# Altium PCB 拉低1.8V.PcbDoc
Units mil, origin at the board's own origin, x right, y up, seen from the top; angles counter-clockwise.
Board outline 1865 x 1145 mil, 2 copper layers (Top Layer, Bottom Layer); 15 components, 10 nets, 48 pads, 0 vias.
Unrouted connection lines stored in the file: 2.
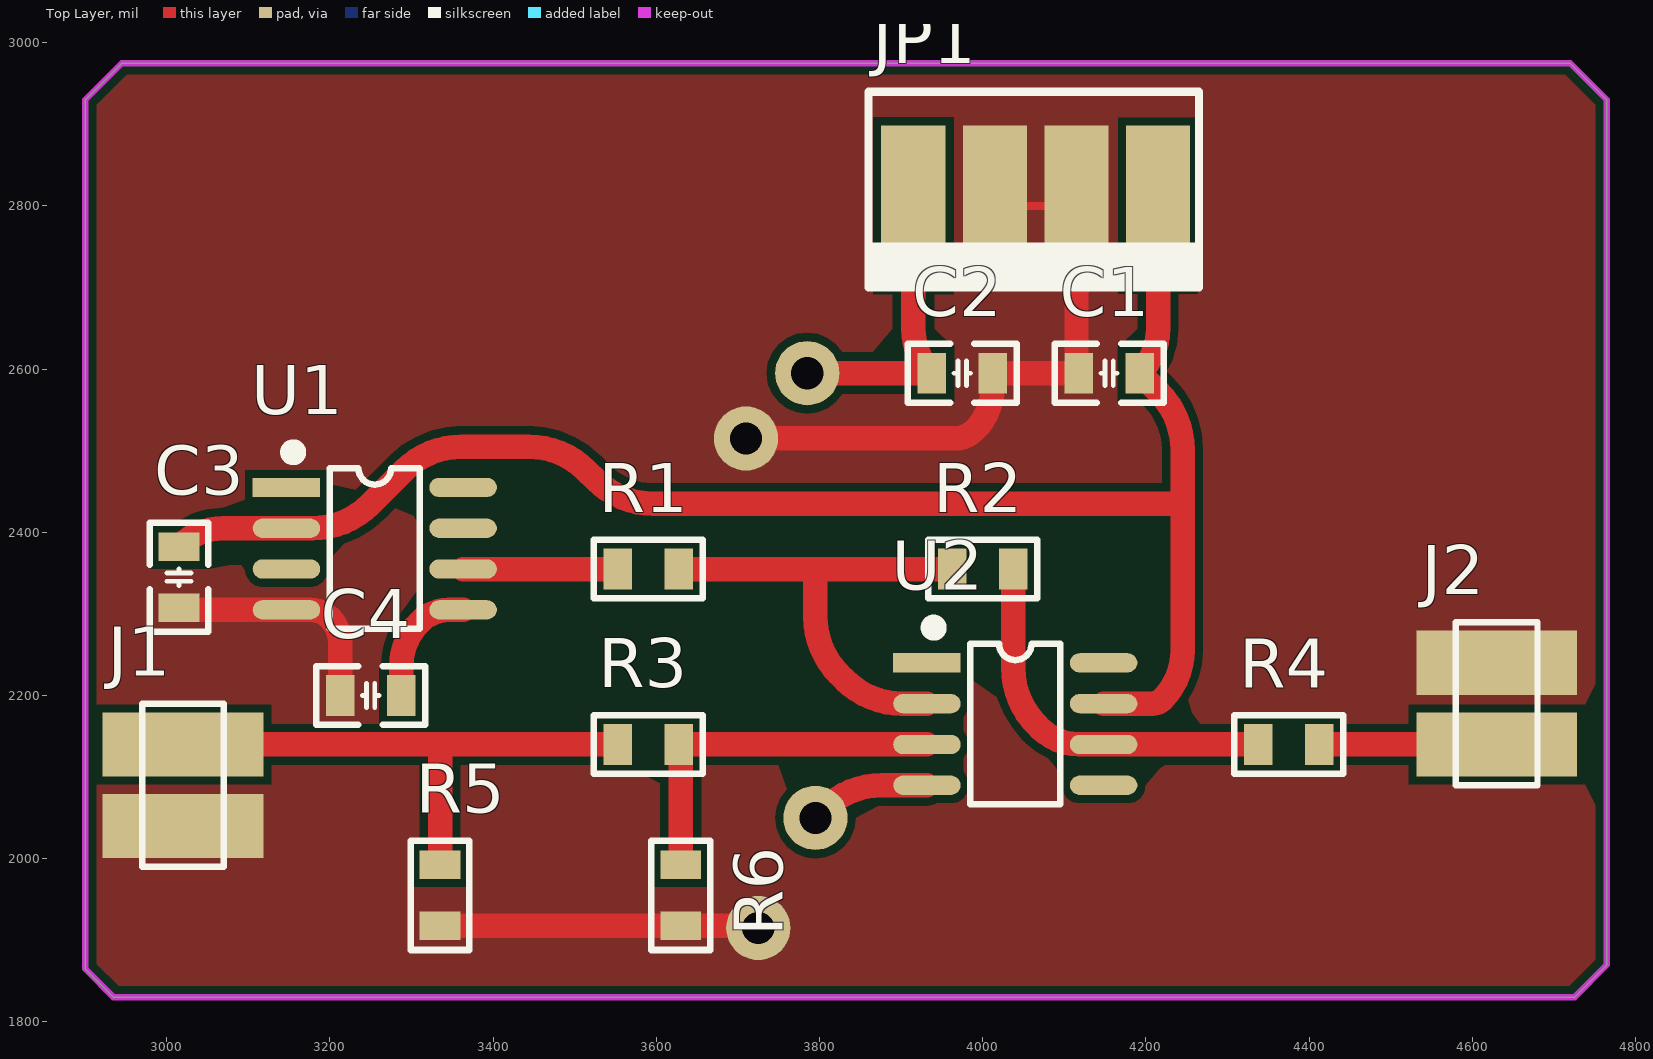
[diagram p0: Top Layer view]
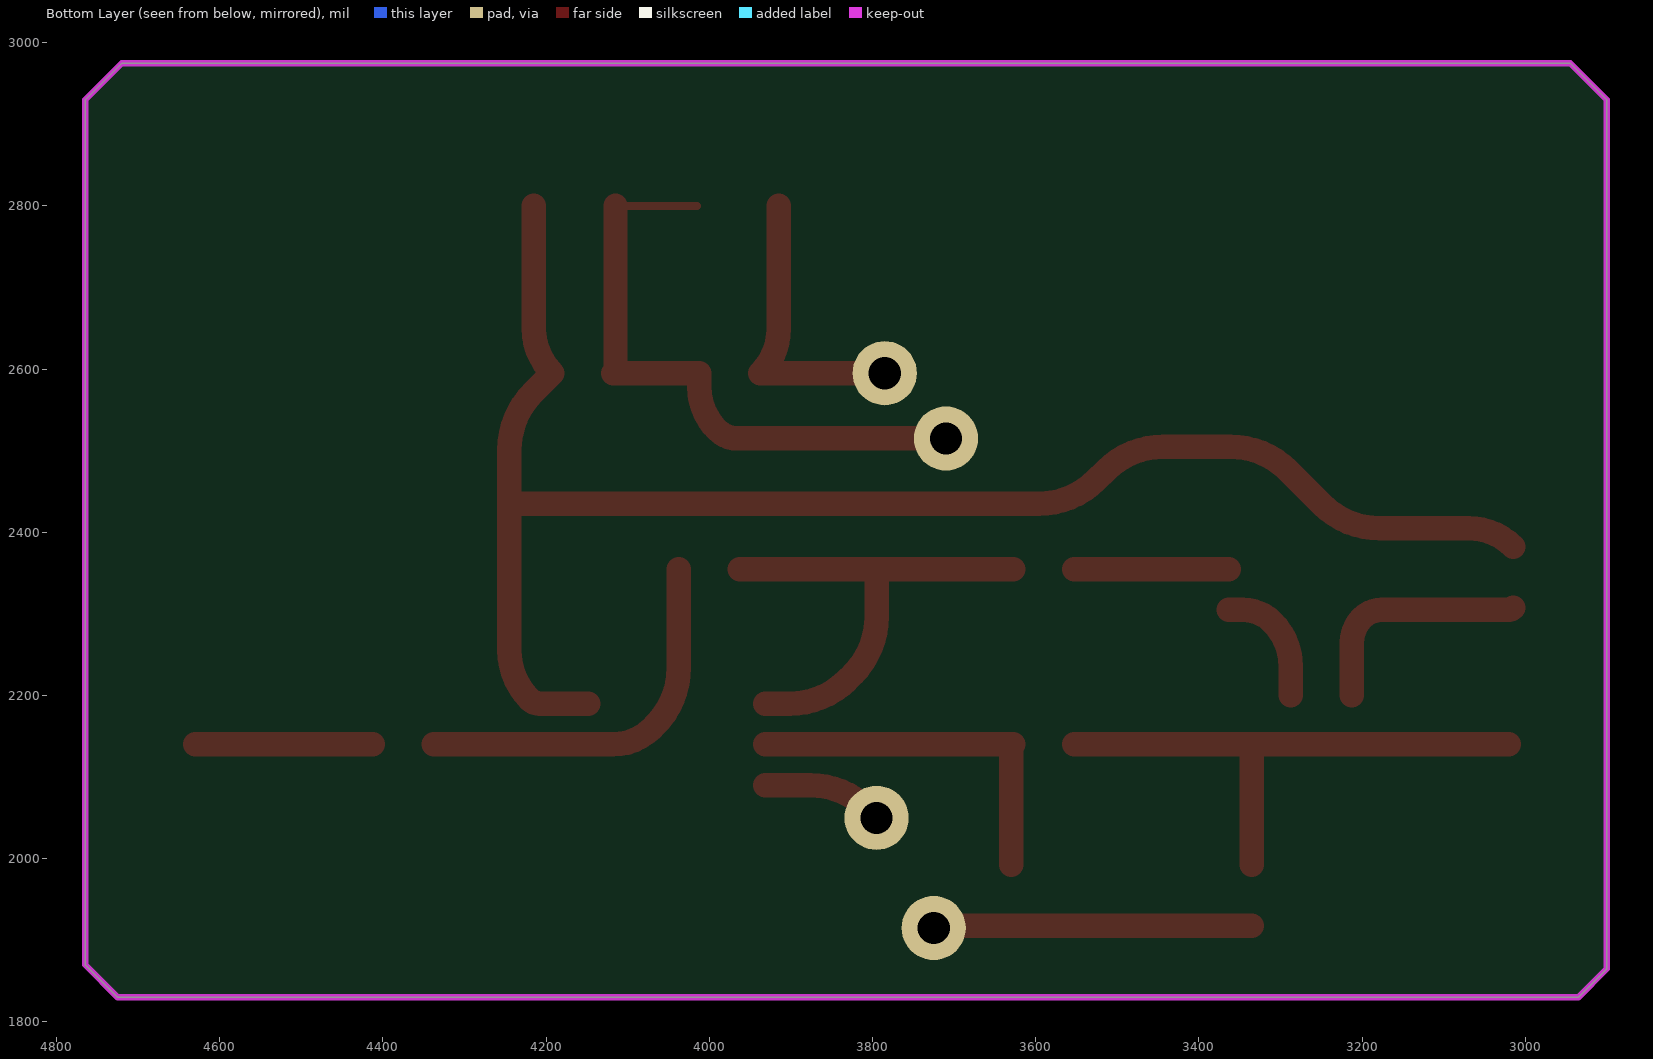
[diagram p1: Bottom Layer view, seen from below]

## Layer stack, top to bottom
Top Solder: solder mask 0.4, Solder Resist, Dk 3.5
Top Layer: signal copper 1.4
Dielectric 1: dielectric 12.6, FR-4, Dk 4.8
Bottom Layer: signal copper 1.4
Bottom Solder: solder mask 0.4, Solder Resist, Dk 3.5

## Board outline
2900,1865 2935,1830 4725,1830 4765,1870 4765,2930 4720,2975 2945,2975 2900,2930

## Design rules (kind name [scope] priority, off if disabled: settings)
Clearance [All] p1: gap=10
PlaneConnect [All] p1: planeconnectstyle=Direct reliefexpansion=20 reliefentries=4 reliefconductorwidth=10 reliefairgap=10
PolygonConnect [All] p1: connectstyle=Direct reliefconductorwidth=10 reliefentries=4 polygonreliefangle="90 Angle" airgapwidth=10
RoutingVias [All] p1: holewidth=28 width=50 viastyle="Through Hole" minholewidth=28 minwidth=50 maxholewidth=28 maxwidth=50
SolderMaskExpansion [All] p1: expansion=4
Width [All] p1: maxlimit=30 minlimit=10 preferedwidth=10 minimp=50.000000 maximp=50.000000 favimp=50.000000
29 further rules are at their usual default settings.

## Components (designator, comment, footprint, x,y, rotation, side; value= is the part's Value field where it differs from the comment)
C1 "104" "C 0805_L" 4155,2595 r0 top
C2 "104" "C 0805_L" 3975,2595 r180 top
C3 "104" "C 0805_L" 3015,2345 r90 top
C4 "104" "C 0805_L" 3250,2200 r180 top
J1 "SMA" HDR2.54-LI-2P 3020,2090 r270 top
J2 "SMA" HDR2.54-LI-2P 4630,2190 r90 top
JP1 "HDR-1X4" KF2510-LI-4P 4065,2800 r180 top
R1 "2.7K" "R 0805_L" 3590,2355 r0 top
R2 "1k" "R 0805_L" 4000,2355 r0 top
R3 "1k" "R 0805_L" 3590,2140 r0 top
R4 "51R" "R 0805_L" 4375,2140 r0 top
R5 "51R" "R 0805_L" 3335,1955 r90 top
R6 "2.7k" "R 0805_L" 3630,1955 r90 top
U1 "REF" SOP8_M 3255,2380 r0 top
U2 "OPA" SOP8_M 4040,2165 r0 top

## Footprints (in the part's own frame and the unit in brackets; to place one, negate y for a bottom-side part, rotate by r counter-clockwise, add the part's x,y. Pads: shape width x height; smd on the part's side, far side on the other; paste and mask are expansions set on the pad)
"C 0805_L" [mil] "无极性贴片电容"
  rect 35x50 smd: 1(-37.4,0) 2(37.4,0)
  silkscreen extent -67,-36 67,36, body extent -39,-24 39,24, height 20
HDR2.54-LI-2P [mm] "排针，2脚"
  rect 2x5 smd: 1(-1.27,0) 2(1.27,0)
  silkscreen extent -2.54,-1.27 2.54,1.27, body extent -2.54,-1.27 2.54,1.27, height 8.5
KF2510-LI-4P [mm] "接插件/2A"
  rect 2x5 smd: 1(-3.81,0) 2(-1.27,0) 3(1.27,0) 4(3.81,0)
  silkscreen extent -5.08,-3.56 5.21,2.54, body extent -5.08,-3.5 5.08,2.4, height 11.05
"R 0805_L" [mil] "1/8W贴片电阻"
  rect 35x50 smd: 1(-37.4,0) 2(37.4,0)
  silkscreen extent -67,-36 67,36, body extent -39,-25 39,25, height 20
SOP8_M [mm] "5*6*1.8mm（长宽高）"
  rect 2.1x0.6 smd: 1(-2.75,1.905)
  oval 2.1x0.6 smd: 2(-2.75,0.635) 3(-2.75,-0.635) 4(-2.75,-1.905) 5(2.75,-1.905) 6(2.75,-0.635) 7(2.75,0.635) 8(2.75,1.905)
  silkscreen extent -2.69,-2.5 1.4,3.15, body extent -3,-2.5 3,2.5, height 1.9

## Part data
C1 C2 C3 C4: library part C, "无极性贴片电容"
JP1: library part "Header 4", "4P接插件"
R1 R2 R3 R4 R5 R6: library part R, "贴片电阻"
U1 U2: library part 单运放

## Free pads (board coordinates)
  round 78.74 hole 39.37: 0(3785,2595) 1(3795,2050) 2(3725,1915) 3(3710,2515)

## Nets (pads, with @x,y where several pads share a name; then routed paths per layer and width w, separated by ;. In a path a pad name is that pad's centre, name@x,y a point inside that pad or via, vN(x,y) a via of type N, cw(c..) or ccw(c..) an arc to the next point about the centre after c; other vN are vias at no path point)
GND: C1.1 C2.1 C3.1 C4.2 J1.2 J2.2 JP1.2 JP1.3 pad.2 pad.3 R5.1 R6.1 U1.4 | length 1447
  Top Layer w10: JP1.3 JP1.2
  Top Layer w30: C3.1 ccw(c3021.27,2313.86) 3021.27,2305 U1.4 3175.86,2305 cw(c3175.86,2270.86) 3200,2295 cw(c3169.58,2264.58) 3212.6,2264.58 C4.2 ; R5.1 R6.1 3718.73,1917.6 cw(c3718.73,1908.73) pad.2 ; pad.3 3965,2515 ccw(c3965,2551.21) 3990.61,2525.61 ccw(c3937.98,2578.23) 4012.4,2578.23 C2.1 C1.1 cw(c4123.86,2601.26) 4115,2601.26 JP1.2
NetC4_1: C4.1 U1.5 | length 153.3
  Top Layer w30: C4.1 3287.4,2235.45 cw(c3364.55,2235.45) 3310,2290 cw(c3346.21,2253.79) 3346.21,2305 U1.5
NetJ1_1: J1.1 R3.1 R5.2 | length 680.2
  Top Layer w30: J1.1 3335,2140 ; R5.2 3335,2140 ; R3.1 3335,2140
NetJ2_1: J2.1 R4.2 | length 217.6
  Top Layer w30: R4.2 J2.1
NetR1_1: R1.1 U1.6 | length 189.3
  Top Layer w30: U1.6 R1.1
NetR1_2: R1.2 R2.1 U2.2 | length 590.2
  Top Layer w30: R1.2 3795,2355 ; U2.2 3901.42,2190 cw(c3901.42,2290) 3830.71,2219.29 3824.29,2225.71 cw(c3895,2296.42) 3795,2296.42 3795,2355 ; R2.1 3795,2355
NetR2_2: R2.2 R4.1 U2.6 | length 477.1
  Top Layer w30: R2.2 4037.4,2234.02 ccw(c4137.4,2234.02) 4066.69,2163.31 4070,2160 ccw(c4118.28,2208.28) 4118.28,2140 U2.6 R4.1
NetR3_2: R3.2 R6.2 U2.3 | length 452.6
  Top Layer w30: R6.2 3630,2133.71 ccw(c3621.11,2133.71) R3.2 U2.3
VCC: C1.2 C3.2 JP1.1 U1.2 U2.7 | length 1998.9
  Top Layer w30: C3.2 cw(c3069.57,2327.83) 3069.57,2405 U1.2 3178.58,2405 ccw(c3178.58,2505) 3249.29,2434.29 3290.71,2475.71 cw(c3361.42,2405) 3361.42,2505 3443.58,2505 cw(c3443.58,2405) 3514.29,2475.71 3525.71,2464.29 ccw(c3596.42,2535) 3596.42,2435 4232.93,2435 cw(c4232.93,2417.93) 4245,2430 ; U2.7 4207.93,2190 ccw(c4207.93,2207.07) 4220,2195 ccw(c4159.64,2255.36) 4245,2255.36 4245,2430 ; JP1.1 4215,2649.56 cw(c4137.83,2649.56) C1.2 4215.71,2571.68 cw(c4145,2500.97) 4245,2500.97 4245,2430
VEE: C2.2 JP1.4 pad.0 pad.1 U2.4 | length 512.6
  Top Layer w30: pad.0 C2.2 cw(c3992.17,2649.57) 3915,2649.57 JP1.4 ; pad.1 3805.71,2060.71 cw(c3876.42,1990) 3876.42,2090 U2.4
pads on no net: U1.1 U1.3 U1.7 U1.8 U2.1 U2.5 U2.8

## Polygon pours and split planes (outlines as drawn)
GND on Top Layer "Keep-Out Layer-No Net" (solid, remove dead copper, pour order 0): 2855,1755 4788.58,1755 ccw(c4788.58,1855) 4859.29,1784.29 4930,1855 ccw(c4869.64,1915.36) 4955,1915.36 4955,2990 4955,3018.58 ccw(c4855,3018.58) 4925.71,3089.29 4915,3100 3175,3100 2941.42,3100 ccw(c2941.42,3000) 2870.71,3070.71 2835,3035

## Keep-outs
Keep-Out Layer:
  the board outline again, w8